# EAGLE board console_soundboard (EAGLE 7.3.0)
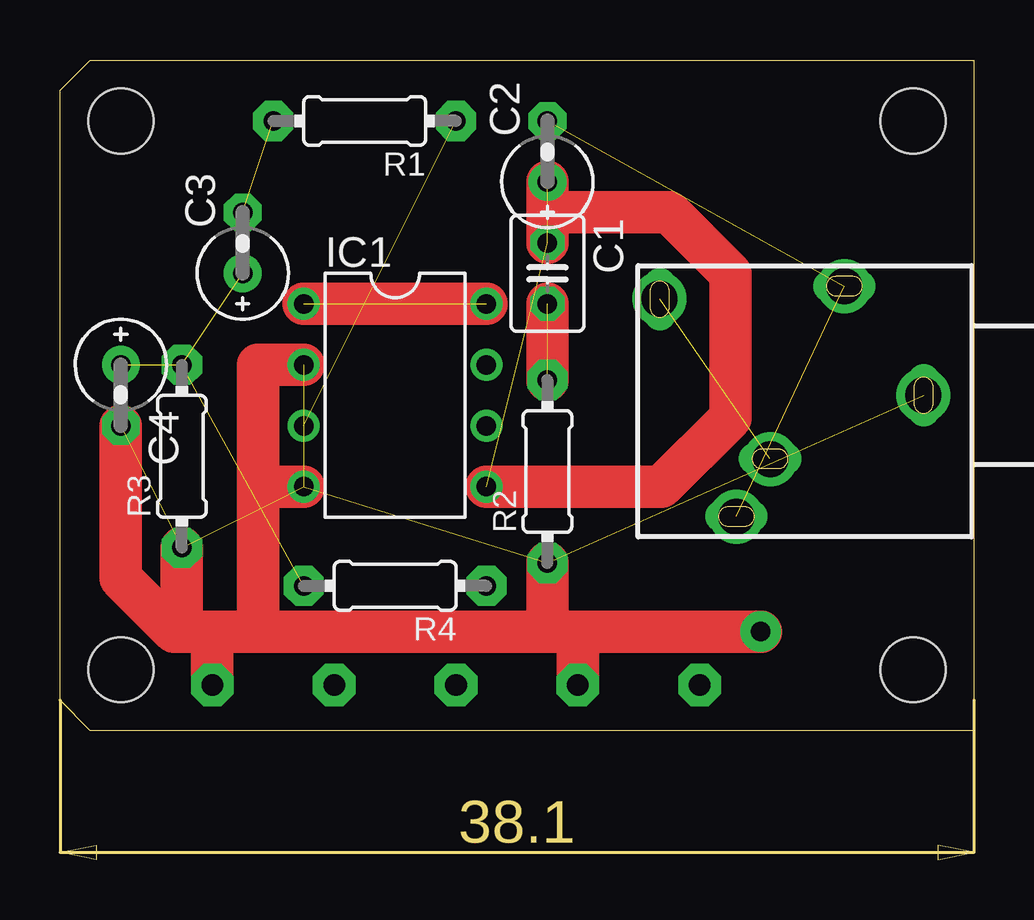
[diagram p0: board, top side]
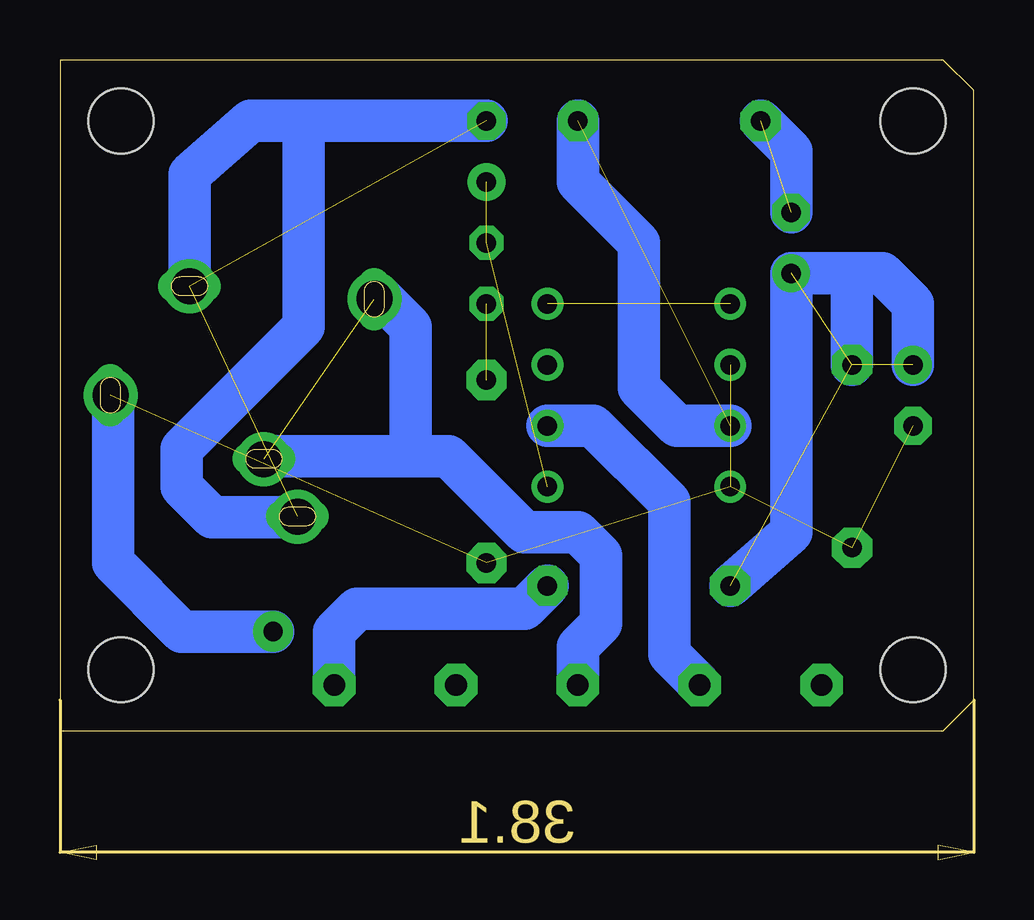
[diagram p1: board, bottom side, seen from below]

Size 38.1 x 27.94 mm. Coordinates in mm from the lower left corner, seen from the top.
Outline: 0,1.27 0,26.67 1.27,27.94 38.1,27.94 38.1,0 1.27,0 0,1.27
Copper layers (1*16): Top 0.035mm / dielectric 1.5mm / Bottom 0.035mm
Design rules "default": minimum track width 10mil, minimum drill 24mil, track to track 8mil, track to pad 8mil, pad to pad 8mil, via to via 8mil, smd to smd 8mil, copper to edge 40mil, drill to drill 8mil, minimum pad ring 10mil, minimum via ring 8mil, stop-mask expansion 4mil, vias tented up to drill 0mil, thermal gap 10mil
Holes 2.7 mm at 2.54,25.4 2.54,2.54 35.56,25.4 35.56,2.54

## Footprints (pad centres in the part's own frame; a part is rotated, then mirrored left to right if it is on the bottom)
C025-030X050 = drill 0.813 pad 1.422 octagon: 1 -1.27,0; 2 1.27,0
E2,5RE = drill 0.813 pad 1.575: + -1.27,0 | drill 0.813 pad 1.575 octagon: - 1.27,0
DIL08 = drill 0.813 pad 1.27: 1 -3.81,-3.81; 2 -1.27,-3.81; 3 1.27,-3.81; 4 3.81,-3.81; 5 3.81,3.81; 6 1.27,3.81; 7 -1.27,3.81; 8 -3.81,3.81
0204/7 = drill 0.813 pad 1.676 octagon: 1 -3.81,0; 2 3.81,0
1503_09 = drill 0.8 pad 1.2 long: 1 0,-2.1; 2 -4.55,-5.4; 3 5.05,-9.9; 4 -4,-13.1; 5 2.65,-8.5

## Placement (x,y rotation side)
C1  47nF  [C025-030X050]  20.32,19.05 270 top
C2  220uF  [E2,5RE]  20.32,24.13 90 top
C3  10uF  [E2,5RE]  7.62,20.32 90 top
C4  33nF  [E2,5RE]  2.54,13.97 270 top
IC1  LM386N-3  [DIL08]  13.97,13.97 270 top
R1  10K  [0204/7]  12.7,25.4 180 top
R2  10R  [0204/7]  20.32,10.79 90 top
R3  150R  [0204/7]  5.08,11.43 90 top
R4  270R  [0204/7]  13.97,6.03 180 top
X1  1503_09  [1503_09]  38.1,13.97 270 top

## Library data of the parts
C1-C4 R1-R4 = adafruit
IC1 = linear
X1 = con-lumberg; OC_FARNELL: 1243244; OC_NEWARK: unknown

## Nets
IN: R4.1
N$1: IC1.3 R1.1
N$2: C1.1 C2.+ IC1.5
N$3: C1.2 R2.2
N$4: C3.+ C4.+ R3.2 R4.2
N$5: X1.4 X1.5
N$6: IC1.1 IC1.8
N$12: C4.- IC1.2 IC1.4 R2.1 R3.1 X1.1
NN: C3.- R1.2
OUT: C2.- X1.2 X1.3
VCC: IC1.6

## Tracks (layer width: path | path; a pad name or v marks a point on that pad's centre or on a via)
IN  (via drill 0.9 pad 1.78)
  Bottom 1.778: R4.1 18.73,5.08 25.72,5.08 26.67,4.13 v26.67,1.91
N$1  (1 unrouted)
  Bottom 1.778: IC1.3 12.38,12.7 13.97,14.29 13.97,20.32 16.51,22.86 R1.1
N$2  (2 unrouted)
  Top 1.778: C1.1 20.32,21.59 | 20.32,21.59 C2.+ | IC1.5 25.08,10.16 27.94,13.02 27.94,19.05 25.4,21.59 20.32,21.59
N$3  (1 unrouted)
  Top 1.778: R2.2 C1.2
N$4  (3 unrouted)
  Bottom 1.778: R4.2 7.62,8.26 C3.+ 5.08,19.05 | R3.2 5.08,19.05 | 5.08,19.05 3.81,19.05 2.54,17.78 C4.+
N$5  (1 unrouted)
N$6  (1 unrouted)
  Top 1.778: IC1.1 IC1.8
N$7  (via drill 1.5)
  other vias: 35.99,13.97 29.62,11.3 28.19,8.92 24.99,17.98 32.69,18.52
N$8
  Bottom 1.778: 27.94,25.08 27.94,16.83 33.02,11.75 33.02,10.16 31.75,8.89 27.94,8.89
N$11  (via drill 0.9 pad 1.78)
  Bottom 1.778: v16.51,1.91 16.51,3.49 15.56,4.45 15.56,7.3 16.51,8.26 18.73,8.26 21.91,11.43 23.5,11.43 | 23.5,11.43 29.21,11.43 29.53,11.11 | 23.5,11.43 23.5,16.83 24.77,18.1 25.08,17.78
N$12  (via drill 0.8 pad 1.68, 0.9 pad 1.78)  (5 unrouted)
  Top 1.778: C4.- 2.54,6.35 4.76,4.13 5.08,4.13 | 5.08,4.13 6.35,4.13 | 6.35,4.13 8.26,4.13 | 8.26,4.13 20.32,4.13 | 20.32,4.13 21.59,4.13 | 6.35,4.13 v6.35,1.91 | 8.26,4.13 8.26,10.16 | 8.26,10.16 8.26,15.24 IC1.2 | IC1.4 8.26,10.16 | R3.1 5.08,4.13 | R2.1 20.32,4.13 | v21.59,1.91 21.59,4.13 | 21.59,4.13 v29.21,4.13
  Bottom 1.778: v29.21,4.13 33.02,4.13 35.88,6.99 35.88,13.65 36.2,13.97
NN  (1 unrouted)
  Bottom 1.778: C3.- 7.62,24.13 R1.2
OUT  (2 unrouted)
  Bottom 1.778: C2.- 30.16,25.4 32.7,23.18 32.7,18.41
VCC  (via drill 0.9 pad 1.78)
  Bottom 1.778: v11.43,1.91 12.7,3.17 12.7,9.53 15.88,12.7 IC1.6

## Text on the board
Reference: GND | VCC | SPKR(+) | SPKR(-) | SIG